# Altium PCB BMS (1).PcbDoc
Units mm, origin at the board's own origin, x right, y up, seen from the top; angles counter-clockwise.
Board outline 223.65 x 130.81 mm, 2 copper layers (Top Layer, Bottom Layer); 85 components, 67 nets, 268 pads, 0 vias.
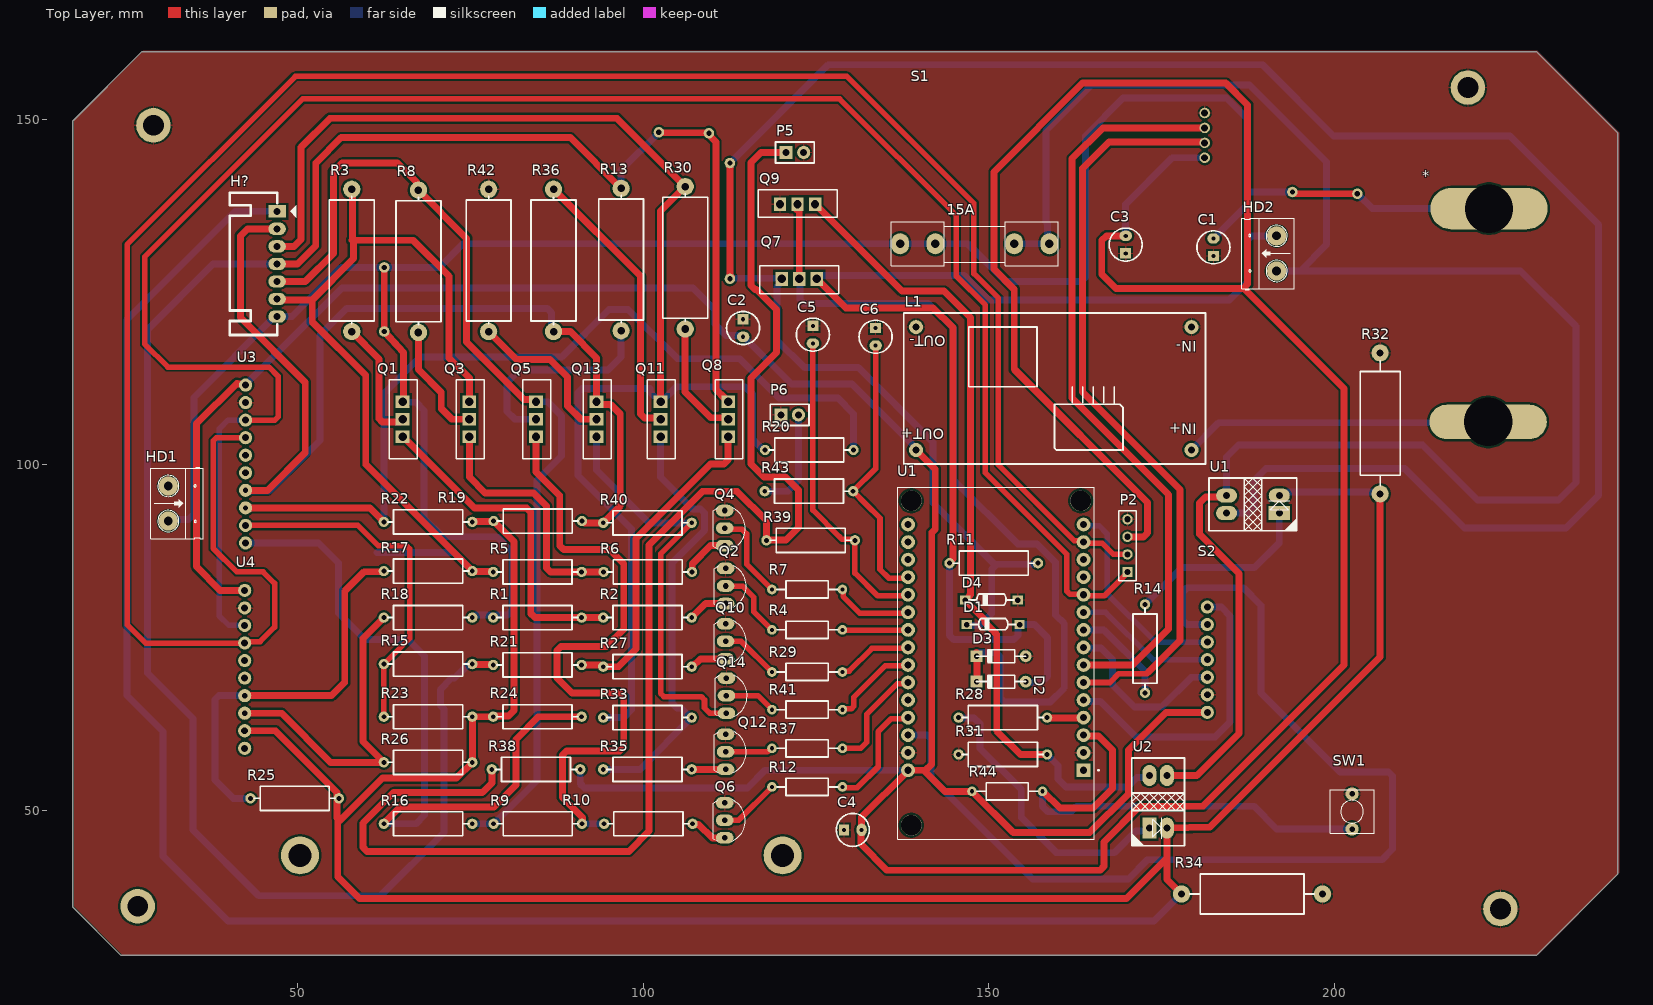
[diagram p0: Top Layer view]
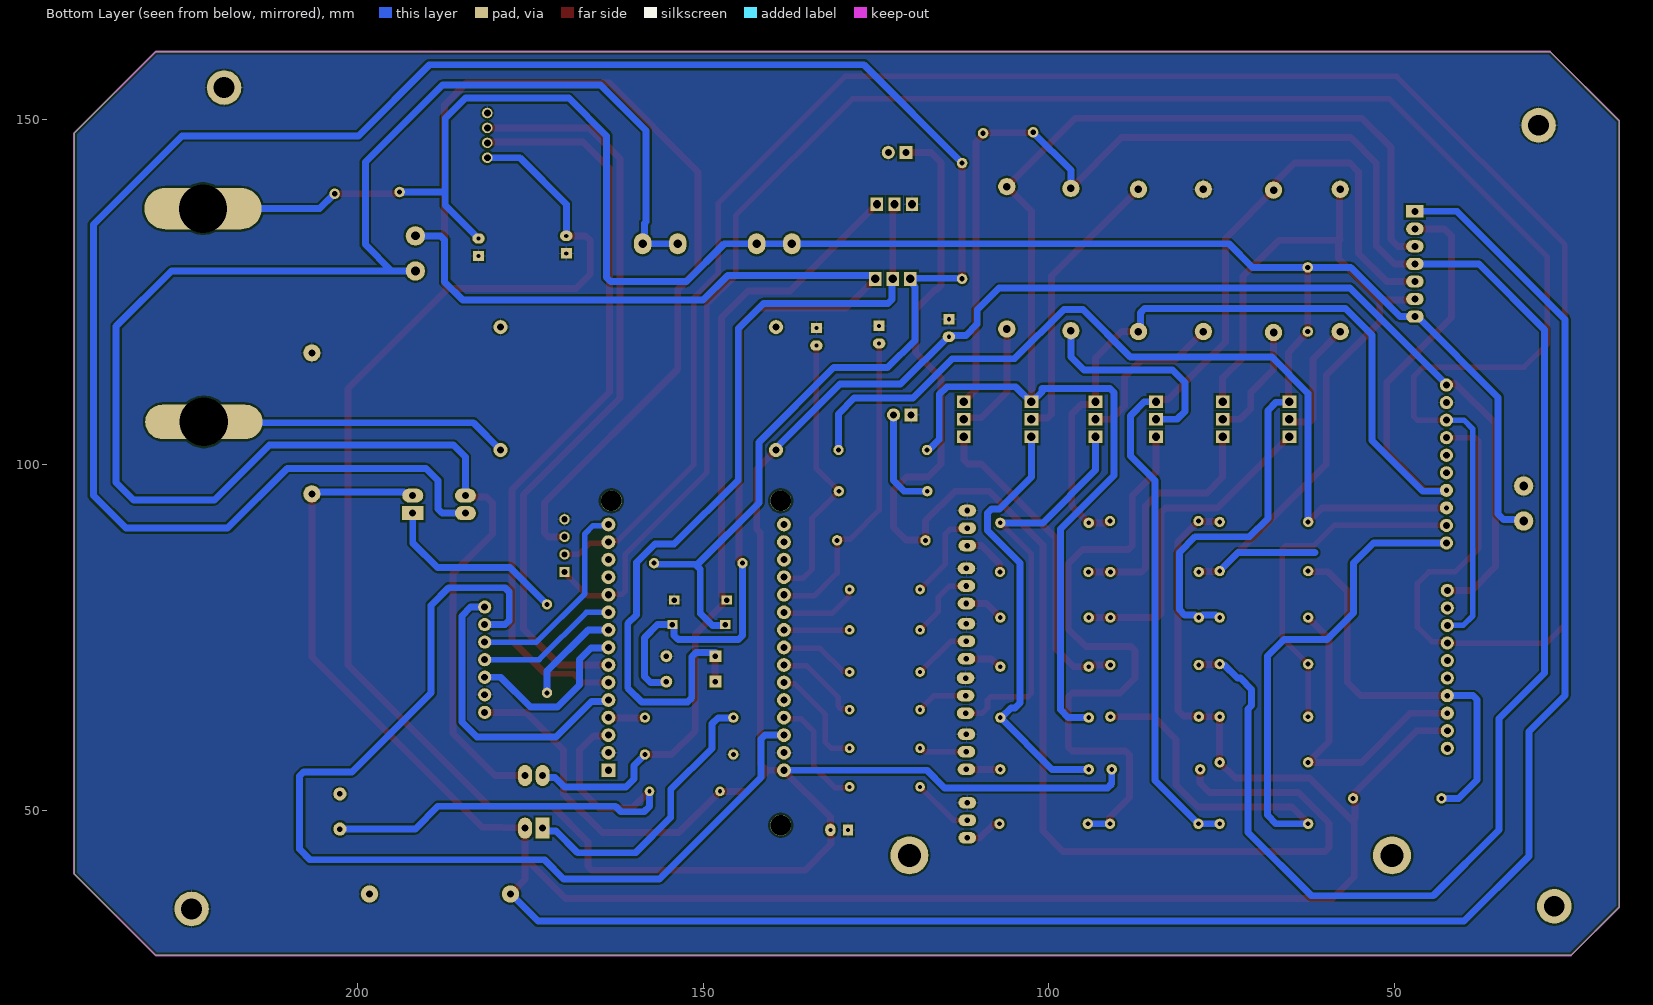
[diagram p1: Bottom Layer view, seen from below]
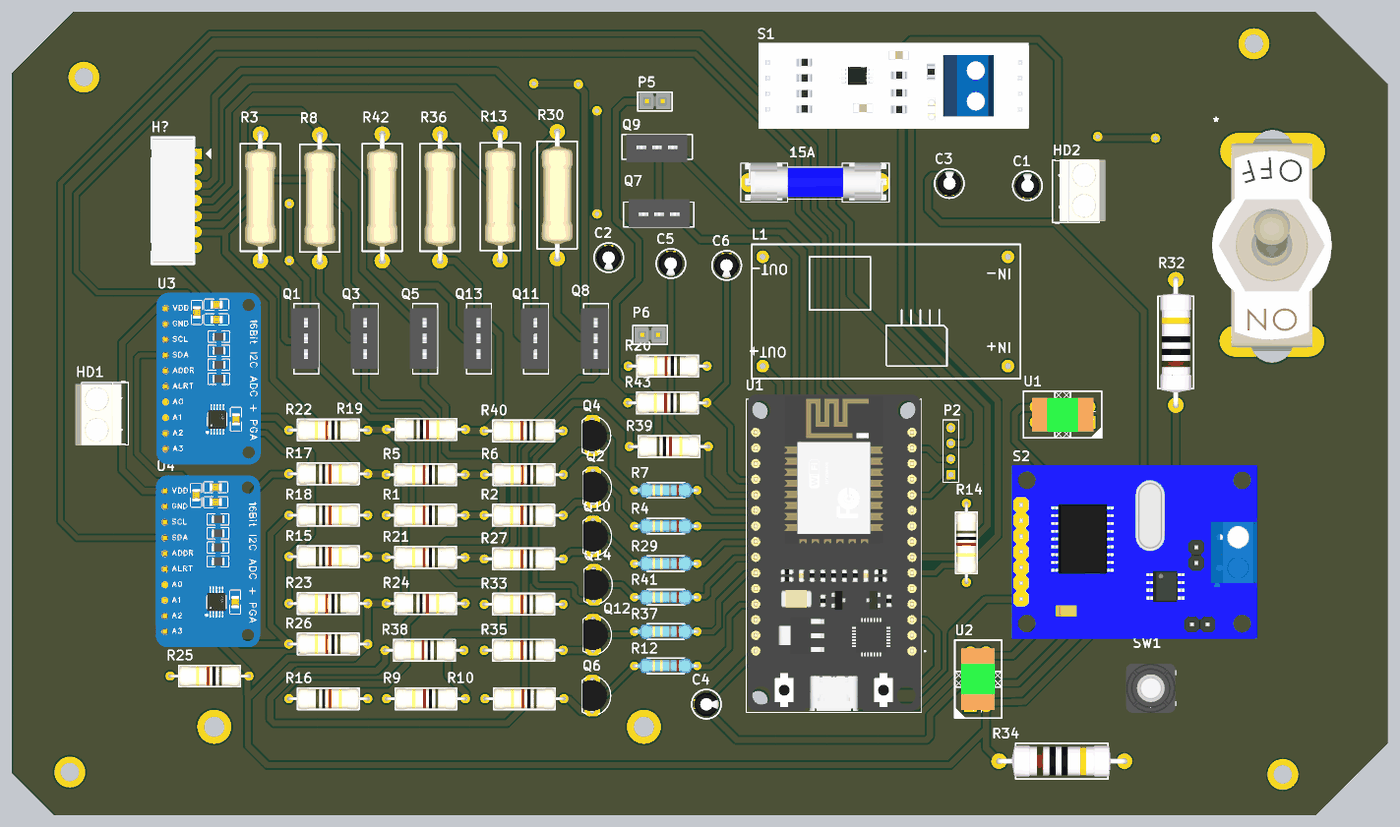
[diagram p2: 3D render of the assembled board from above, using the file's embedded part models]

## Layer stack, top to bottom
Top Solder: solder mask 0.0102, Solder Resist, Dk 3.5
Top Layer: signal copper 0.0356
Dielectric 1: dielectric 0.32, FR-4, Dk 4.8
Bottom Layer: signal copper 0.0356
Bottom Solder: solder mask 0.0102, Solder Resist, Dk 3.5

## Board outline
24.384,28.956 17.399,35.941 17.399,127.889 17.399,149.733 27.432,159.766 229.235,159.766 241.046,147.955 241.046,40.767 229.235,28.956

## Design rules (kind name [scope] priority, off if disabled: settings)
Clearance [All] p1: gap=0.3 ignorepadtopadclearanceinfootprint=FALSE
PolygonConnect [All] p1: connectstyle=Relief reliefconductorwidth=0.254 reliefentries=4 polygonreliefangle="90 Angle" airgapwidth=0.254
RoutingVias [All] p1: holewidth=0.711 width=1.27 viastyle="Through Hole" minholewidth=0.711 minwidth=1.27 maxholewidth=0.711 maxwidth=1.27
SolderMaskExpansion [All] p1: expansion=0 istentingtop=FALSE
Width [All] p1: maxlimit=1.2 minlimit=0.8 preferedwidth=1 minimp=50.000000 maximp=50.000000 favimp=50.000000
30 further rules are at their usual default settings.

## Components (designator, comment, footprint, x,y, rotation, side; value= is the part's Value field where it differs from the comment)
15A "Fuse" Fuse 147.955,131.953 r0 top
* "Component_3" PCBComponent_1#1 222.25,129.159 r270 top
C1 "Cap" C3MM 182.499,131.445 r90 top value=1uf
C2 "Cap" C3MM 114.427,119.761 r270 top value=100uF
C3 "Cap" C3MM 169.799,131.826 r90 top value=1uf
C4 "Cap" C3MM 130.302,47.117 r0 top value=100uF
C5 "0.1uf" C3MM 124.531,118.797 r270 top
C6 "Cap" C3MM 133.604,118.491 r270 top value=0.1UF
D1 "Diode Zener" DIODE/NOM/0.5A 154.432,76.835 r180 top
D2 "Diode Schottky" DO-35 151.765,68.58 r180 top
D3 "Diode Schottky" DO-35 151.765,72.263 r180 top
D4 "Diode Zener" DIODE/NOM/0.5A 154.178,80.391 r180 top
H? "PIN" "Header 7P DC 2.54" 46.99,136.653 r180 top
HD1 "Header 2" HED2 31.242,96.901 r270 top
HD2 "Header 2" HED2 191.643,128.016 r90 top
L1 "" BUCK_LM2596 159.766,110.236 r180 top
P2 "LCD" HDR1X4 170.053,84.455 r90 top value="Header 4P"
P5 "Header 2" "Header 2" 120.65,145.161 r0 top
P6 "Header 2" "Header 2" 119.888,107.188 r0 top
Q1 "IRF9540 DIP" TO220 65.151,104.013 r90 top
Q2 "2N222" TO92-123 111.887,82.423 r270 top value=C1815
Q3 "IRF9540 DIP" TO220 74.803,104.013 r90 top
Q4 "2N222" TO92-123 111.76,90.805 r270 top value=C1815
Q5 "IRF9540 DIP" TO220 84.455,104.013 r90 top
Q6 "2N222" TO92-123 111.76,48.514 r270 top value=C1815
Q7 "IRF3709" TO220 120.015,126.873 r0 top
Q8 "IRF9540 DIP" TO220 112.268,104.013 r90 top
Q9 "IRF3709" TO220 124.841,137.668 r180 top
Q10 "2N222" TO92-123 111.887,74.422 r270 top value=C1815
Q11 "IRF9540 DIP" TO220 102.489,104.013 r90 top
Q12 "2N222" TO92-123 111.887,58.42 r270 top value=C1815
Q13 "IRF9540 DIP" TO220 93.218,104.013 r90 top
Q14 "2N222" TO92-123 112.014,66.548 r270 top value=C1815
R1 "10k" "tro vach 1/2w" 84.659,77.851 r180 top
R2 "56k" "tro vach 1/2w" 100.584,77.851 r180 top
R3 "330R" "tro vach 2w" 57.785,129.54 r270 top
R4 "1k" "tro vach 1/4w" 123.698,76.073 r0 top
R5 "10k" "tro vach 1/2w" 84.659,84.455 r180 top
R6 "47k" "tro vach 1/2w" 100.634,84.455 r180 top
R7 "1k" "tro vach 1/4w" 123.698,81.915 r0 top
R8 "330R" "tro vach 2w" 67.437,129.413 r270 top
R9 "10k" "tro vach 1/2w" 84.709,48.006 r180 top
R10 "30k" "tro vach 1/2w" 100.711,48.006 r180 top
R11 "10k" "tro vach 1/2w" 150.699,85.725 r180 top
R12 "1k" "tro vach 1/4w" 123.698,53.34 r0 top
R13 "330R" "tro vach 2w" 96.774,129.667 r270 top
R14 "1k" "tro vach 1/2w" 172.593,73.356 r270 top
R15 "20K" "tro vach 1/2w" 68.834,71.12 r0 top
R16 "30K" "tro vach 1/2w" 68.834,48.006 r0 top
R17 "40K" "tro vach 1/2w" 68.834,84.582 r0 top
R18 "50K" "tro vach 1/2w" 68.834,77.851 r0 top
R19 "10K" "tro vach 1/2w" 84.709,91.821 r0 top
R20 "10K" "tro vach 1/2w" 124.002,102.108 r180 top
R21 "10k" "tro vach 1/2w" 84.659,70.993 r180 top
R22 "10K" "tro vach 1/2w" 68.834,91.694 r180 top
R23 "10K" "tro vach 1/2w" 68.834,63.5 r180 top
R24 "10K" "tro vach 1/2w" 84.659,63.5 r0 top
R25 "10k" "tro vach 1/2w" 49.53,51.689 r180 top
R26 "10k" "tro vach 1/2w" 68.834,56.896 r180 top
R27 "20k" "tro vach 1/2w" 100.584,70.739 r180 top
R28 "1k" "tro vach 1/2w" 152.019,63.373 r0 top
R29 "1k" "tro vach 1/4w" 123.698,69.977 r0 top
R30 "330R" "tro vach 2w" 106.045,129.921 r270 top
R31 "1k" "tro vach 1/2w" 152.019,58.039 r180 top
R32 "0.02R" "tro vach 3w" 206.629,105.958 r90 top
R33 "10k" "tro vach 1/2w" 100.584,63.373 r180 top
R34 "0.02R" "tro vach 3w" 188.087,37.846 r0 top
R35 "10k" "tro vach 1/2w" 100.584,55.88 r180 top
R36 "330R" "tro vach 2w" 86.995,129.54 r90 top
R37 "1k" "tro vach 1/4w" 123.698,58.928 r0 top
R38 "10k" "tro vach 1/2w" 84.455,55.88 r180 top
R39 "1k" "tro vach 1/2w" 124.206,89.027 r0 top
R40 "10k" "tro vach 1/2w" 100.584,91.567 r180 top
R41 "1k" "tro vach 1/4w" 123.698,64.516 r0 top
R42 "330R" "tro vach 2w" 77.597,129.54 r270 top
R43 "10k" "tro vach 1/2w" 123.952,96.139 r180 top
R44 "1k" "tro vach 1/4w" 152.654,52.705 r0 top
S1 "RS485" PCBComponent_1#2 176.53,162.814 r270 top
S2 "MSP1505" PCBComponent_1#3 186.563,62.103 r90 top
SW1 "SW" SW2 202.565,47.244 r90 top value="SW chip 2 pin"
U1 "ESP32-DEVKIT-V1" MODULE_ESP32_DEVKIT_V1 151.003,71.268 r180 top
U1 "OPTO_U" OPTO_U 192.024,98.044 r270 top value=TLP5211
U2 "OPTO_U" OPTO_U 178.308,47.371 r180 top value=TLP5211
U3 "ADS1115" ADS1115 60.579,110.49 r270 top
U4 "ADS1115" ADS1115 60.452,80.772 r270 top

## Footprints (in the part's own frame and the unit in brackets; to place one, negate y for a bottom-side part, rotate by r counter-clockwise, add the part's x,y. Pads: shape width x height; smd on the part's side, far side on the other; paste and mask are expansions set on the pad)
ADS1115 [mil]
  round 75 hole 39.37: 1(-40,-715) 2(60,-715) 3(160,-715) 4(260,-715) 5(360,-715) 6(460,-715) 9(760,-715) 10(860,-715)
  round 75 hole 30: 7(560,-715) 8(660,-715)
  body extent -141,-775 961,-107, height 118
BUCK_LM2596 [mil]
  round 80 hole 40: 1(-770,320) 2(-770,-380) 3(800,-380) 4(800,320)
  silkscreen extent -850,-460 870,400
C3MM [mm]
  rect 1.5x1.58 hole 0.6: 1(-1.27,0)
  oval 1.5x1.8 hole 0.6: 2(1.27,0)
  silkscreen extent -2.39,-2.39 2.39,2.39, body extent -2,-2.03 1.99,1.97, height 7.01
DIODE/NOM/0.5A [mm]
  rect 1.5x1.3 hole 0.8: 1(0,0) 2(7.62,0)
  silkscreen extent 0.64,-0.89 7.11,0.76
DO-35 [mil] "Diode, Axial; Body 3.8 x 1.9 mm (LxDia. max), Lead Dia. 0.53 mm (max); Solder Pad 35mil"
  round 67 hole 32: 1(-139.76,0)
  rect 67x67 hole 32: 2(139.76,0)
  silkscreen extent -140,-37 140,37, body extent -148,-40 148,39, height 89
Fuse [mil] "De Fuse"
  oval 100x120 hole 50: 1(-425,0) 1(-225,0) 2(225,0) 2(425,0)
  silkscreen extent -475,-125 475,125, body extent -448,-117 459,127, height 378
HDR1X4 [mm] "Connector; Header; 4 Position"
  rect 1.5x1.5 hole 0.9: 1(0,0)
  round 1.5 hole 0.9: 2(2.54,0) 3(5.08,0) 4(7.62,0)
  silkscreen extent -1.27,-1.27 8.89,1.27, body extent -1.27,-1.27 8.89,1.27, height 7
"Header 2" [mil] "Connector; Header; 2 Position; Solder Pad 35mil"
  rect 75x75 hole 40: 1(0,0)
  round 75 hole 40: 2(100,0)
  silkscreen extent -60,-60 160,60, body extent -50,-50 150,50, height 330
"Header 7P DC 2.54" [mil]
  rect 100x70 hole 40: 1(0,0.04)
  oval 100x70 hole 40: 2(0,100.04) 3(0,200.04) 4(0,300.04) 5(0,400.04) 6(0,500.04) 7(0,600.04)
  silkscreen extent -110,-105 270,705, body extent -5,-94 271,694, height 237
HED2 [mil] "Header 2, 2 pin, hight 300mil, Pin to Pin 200, Colour Green"
  round 110 hole 50: 1(0,0) 2(200,0)
  silkscreen extent -106,-100 300,200, body extent -92,-140 302,155, height 394
MODULE_ESP32_DEVKIT_V1 [mm]
  rect 2x2 hole 1.02: 1(-12.7,15.515)
  round 2 hole 1.02: 2(-12.7,12.975) 3(-12.7,10.435) 4(-12.7,7.895) 5(-12.7,5.355) 6(-12.7,2.815) 7(-12.7,0.275) 8(-12.7,-2.265) 9(-12.7,-4.805) 10(-12.7,-7.345) 11(-12.7,-9.885) 12(-12.7,-12.425) 13(-12.7,-14.965) 14(-12.7,-17.505) 15(-12.7,-20.045) 16(12.7,-20.045) 17(12.7,-17.505) 18(12.7,-14.965) 19(12.7,-12.425) 20(12.7,-9.885) 21(12.7,-7.345) 22(12.7,-4.805) 23(12.7,-2.265) 24(12.7,0.275) 25(12.7,2.815) 26(12.7,5.355) 27(12.7,7.895) 28(12.7,10.435) 29(12.7,12.975) 30(12.7,15.515)
  round 3 on Mech1: ""(-12.28,23.475)
  round 3 hole 3 unplated: ""(-12.28,-23.475) ""(12.23,23.475) ""(12.23,-23.475)
  silkscreen extent -14.95,-25.48 14.23,25.48, body extent -14.1,-26.26 14.05,25.24, height 7.01
OPTO_U [mil]
  rect 80x120 hole 40: A(200,0)
  oval 80x120 hole 40: C(100,-300) E(200,-300) K(100,0)
  silkscreen extent 0,-400 300,100, body extent 43,-347 260,47, height 374
PCBComponent_1#1 [mm]
  oval 6x17 hole 7 unplated: 1(-7.874,0.127)
  oval 5x17 hole 7: 2(22.987,0)
  body extent -9.86,-9.75 24.64,9.75, height 43.26
PCBComponent_1#2 [mm]
  round 1.524 hole 1: 1(18.415,4.699) 2(16.256,4.699) 3(14.097,4.699) 4(11.938,4.699)
  body extent 8.13,-38.07 22.13,6.6, height 17.88
PCBComponent_1#3 [mm]
  round 1.905 hole 1: 1(2.032,4.953) 2(4.572,4.953) 3(7.112,4.953) 4(9.652,4.953) 5(12.192,4.953) 6(14.732,4.953) 7(17.272,4.953)
  body extent -4.32,-33.3 23.88,6.6, height 14.2
SW2 [mil] "SW button 2pin, 250x 250 mil"
  round 75 hole 31: 1(0,0) 2(200,0)
  silkscreen extent -25,-125 225,125, body extent -60,-163 255,157, height 257
TO92-123 [mil] "TO-92"
  oval 66x100 hole 32: 1(-100,0) 2(0,0) 3(100,0)
  silkscreen extent -117,-65 120,118, body extent -109,-66 109,95, height 245
TO220 [mm]
  rect 1.8x2 hole 1.2: 1(0,0) 2(2.54,0) 3(5.08,0)
  silkscreen extent -3.17,-2.13 8.25,1.91, body extent -2.36,-2.13 7.54,2.37, height 8.08
"tro vach 1/2w" [mm]
  round 1.5 hole 0.7: 1(-6.4,0) 2(6.4,0)
  silkscreen extent -5.84,-1.75 5.84,1.75, body extent -6.62,-1.75 6.62,1.75, height 3.5
"tro vach 1/4w" [mm]
  round 1.4 hole 0.6: 1(-5.1,0) 2(5.1,0)
  silkscreen extent -4.39,-1.25 4.42,1.25, body extent -5.38,-1.2 5.38,1.2, height 2.41
"tro vach 2w" [mm]
  round 2.5 hole 1.1: 1(-10.3,0) 2(10.3,0)
  silkscreen extent -9.27,-3.25 9.14,3.25, body extent -10.56,-2.5 10.56,2.5, height 5.5
"tro vach 3w" [mm]
  round 2.5 hole 1: 1(-10.2,0) 2(10.2,0)
  silkscreen extent -9.02,-2.9 9.02,2.9, body extent -10.56,-2.5 10.56,2.5, height 7.5

## Part data
C1 C2 C3 C4 C6: "Capacitor", LatestRevisionDate=17-Jul-2002, LatestRevisionNote="Re-released for DXP Platform.", PackageReference=RAD-0.3, Published=8-Jun-2000, Publisher="Altium Limited"
C5: library part Cap, "Capacitor", LatestRevisionDate=17-Jul-2002, LatestRevisionNote="Re-released for DXP Platform.", PackageReference=RAD-0.3, Published=8-Jun-2000, Publisher="Altium Limited"
D1 D4: library part "Diode Zener_1", "Zener Diode", LatestRevisionDate=17-Jul-2002, LatestRevisionNote="Re-released for DXP Platform.", PackageReference=DIODE-0.7, Published=8-Jun-2000, Publisher="Altium Limited"
D2 D3: "Schottky Rectifier", PackageDocument=Feb-1998, ComponentLink1Description="Manufacturer Link", ComponentLink1URL=http://www.irf.com/, ComponentLink2Description=Datasheet, ComponentLink2URL=http://www.irf.com/product-info/datasheets/data/10tq.pdf, DatasheetDocument=PD-2.057B, LatestRevisionDate=17-Jul-2002, LatestRevisionNote="Re-released for DXP Platform.", Note="Terminal 2 is the TAB and is electrically connected to the cathode", PackageReference=TO-220AC, Published=8-Jun-2000, Publisher="Altium Limited"
H?: library part "Header 7P 2.54 Duc Cong", "Cắm", Chung_Loai=Cắm, Don_Vi=Con, Ma_Hang=MH004118, Ten_Linh_Kien="Header 7P XH2.54-7P Đực Cong"
HD1 HD2: library part Hed2, "Header 2 (Green)"
L1: library part BUCK_LM2596
P2: library part "Header 4x1", "Header, 4 Pin Pitch 2.54mm", MPN=S1012EC-40-ND, CompanyID=VT-00125, Solder=WAVE
P5 P6: "Header, 2-Pin", LatestRevisionDate=17-Jul-2002, LatestRevisionNote="Re-released for DXP Platform.", Publisher="Altium Limited"
Q1 Q3 Q5 Q8 Q11 Q13: library part "FET IRF9540 DIP", "TO-200", ComponentLink1Description="Manufacturer Link", ComponentLink1URL=http://www.irf.com/, ComponentLink2Description=Datasheet, ComponentLink2URL=http://www.irf.com/product-info/datasheets/data/irf9540.pdf, DatasheetVersion=PD-9.421C, LatestRevisionDate=17-Jul-2002, LatestRevisionNote="Re-released for DXP Platform.", Note="Pin 2 is electrically connected to pin 4.", PackageDescription="TO, Thru-Hole, Vertical, Heatsink Mounted; 3 In-Line Leads; Pitch 2.54 mm", PackageReference=TO-220AB, PackageVersion=Feb-1997, Published=8-Jun-2000, Publisher="Altium Limited"
Q2 Q4 Q6 Q10 Q12 Q14: "NPN 600mW, ECB"
Q7 Q9: library part "FET IRF3709 DIP", "TO-200"
R1 R2 R5 R6 R9 R10 R11 R14 R15 R16 R17 R18 R19 R20 R21 R22 R23 R24 R25 R26 R27 R28 R31 R33 R35 R38 R39 R40 R43: library part "Tro Vach 1/2W 5% 1k", "Cắm", Chung_Loai=Cắm, Don_Vi=Con, Ma_Hang=MH007240, So_Chan=2, Ten_Linh_Kien="Trở 5% 1/2w 1K"
R3 R8 R13 R30 R36 R42: library part "Tro Vach 2W 5% 330R", "Cắm", Chung_Loai=Cắm, Don_Vi=Con, Ma_Hang=MH006373, So_Chan=2, Ten_Linh_Kien="Trở 5% 2w 330R"
R4 R7 R12 R29 R37 R41 R44: library part "Tro Vach 1/4W 5% 1R", "Cắm", Chung_Loai=Cắm, Don_Vi=Con, Ma_Hang=MH007394, So_Chan=2, Ten_Linh_Kien="Trở Vạch 1/4w 5% 1R"
R32 R34: library part "Tro Vach 3W 5% 0.02R", "Cắm", Chung_Loai=Cắm, Don_Vi=Con, Ma_Hang=MH007953, So_Chan=2, Ten_Linh_Kien="Trở 5% 3w 0.02R"
S1: library part Component_3
S2: library part Component_5
SW1: library part SW2, "Switch button 2 pin"
U1: "Dual core, Wi-Fi: 2.4 GHz up to 150 Mbits/s,BLE (Bluetooth Low Energy) and legacy Bluetooth, 32 bits, Up to 240 MHz", Package=None, Availability=Unavailable, MP=ESP32-DEVKIT-V1, Price=None
U1 U2: "Single Opto"
U3 U4: library part Component_2
15A: LatestRevisionDate=17-Jul-2002, LatestRevisionNote="Re-released for DXP Platform.", PackageReference=PIN-W2/E2.8, Published=8-Jun-2000, Publisher="Altium Limited"

## Free pads (board coordinates)
  round 1.524 hole 0.762: 2(112.522,126.873) 3(112.522,143.637) 10(62.484,128.524) 11(102.235,148.082) 12(109.474,147.955) 13(62.484,119.253) 30(193.929,139.446) 31(203.327,139.192)
  round 5 hole 3: 14(29.083,149.098) 16(26.797,36.068) 16(224.028,35.687) 17(219.329,154.559)
  round 5.5 hole 3.3: 28(50.292,43.434) 29(120.142,43.434)

## Nets (pads, with @x,y where several pads share a name; then routed paths per layer and width w, separated by ;. In a path a pad name is that pad's centre, name@x,y a point inside that pad or via, vN(x,y) a via of type N, cw(c..) or ccw(c..) an arc to the next point about the centre after c; other vN are vias at no path point)
+5: C2.2 C3.2 C4.2 L1.4 P2.3 R38.1 R44.1 S1.1 S2.1 U1.30 U3.1 U4.1 | length 652.9
  Top Layer w1: U4.1 38.735,81.788 35.306,85.217 35.306,105.918 41.148,111.76 41.229,111.679 42.245,111.679 U3.1 ; U1.30@138.303,55.605 138.216,55.605 131.572,48.961 C4.2 131.476,47.021 131.476,45.076 135.277,41.275 166.07,41.275 166.655,41.861 166.655,45.37 171.831,50.546 180.975,50.546 201.422,70.993 201.422,110.998 186.944,125.476 186.817,125.476 ; U1.30 140.843,55.753 141.732,56.642 141.732,90.17 142.24,90.678 142.24,99.314 L1.4 ; 140.78,55.562 143.637,52.705 R44.1 153.523,46.736 164.592,46.736 170.18,52.324 170.18,58.674 175.641,64.135 S2.1 ; C3.2 167.005,133.096 166.328,132.419 166.328,127.55 168.402,125.476 186.817,125.476 ; P2.3 172.388,89.535 172.974,90.121 172.974,94.488 153.67,113.792 153.67,125.349 150.749,128.27 150.749,142.367 163.576,155.194 184.277,155.194 187.452,152.019 187.452,126.111 186.817,125.476
  Bottom Layer w1: U3.1 42.418,111.589 49.199,118.37 56.351,125.522 107.151,125.522 110.326,122.347 110.326,120.315 111.977,118.664 113.969,118.664 114.142,118.491 C2.2 114.564,118.491 121.422,111.633 130.185,111.633 139.446,102.372 L1.4 ; R38.1 90.855,53.799 91.441,53.213 115.062,53.213 117.602,55.753 U1.30 ; C3.2 169.799,137.668 176.53,144.399 S1.1
A0: H?.2 Q13.3 R19.2 R36.1 R40.2 U3.7 | length 157.5
  Top Layer w1: U3.7 45.593,96.266 51.054,101.727 51.054,111.887 41.656,121.285 41.656,133.096 42.672,134.112 H?.2 ; R36.1 89.421,119.24 93.218,115.443 Q13.3 93.618,108.693 95.269,108.693 96.647,107.315 96.647,94.03 R40.2 91.498,91.567 91.244,91.821 R19.2
  Bottom Layer w1: U3.7 42.545,96.139 45.847,96.139 53.213,103.505 53.213,118.741 57.027,122.555 86.122,122.555 86.708,121.969 86.708,119.527 R36.1
A1: R20.1 R22.2 U3.8 | length 123.9
  Top Layer w1: U3.8 60.402,93.726 R22.2
  Bottom Layer w1: R22.2 62.434,110.313 67.691,115.57 88.177,115.57 95.035,122.428 97.79,122.428 104.902,115.316 113.919,115.316 119.634,109.601 128.143,109.601 130.402,107.342 R20.1
A2: R15.1 R23.2 U3.9 | length 51
  Top Layer w0.8: U3.9 58.674,91.186 61.595,88.265 65.698,88.265 66.167,87.796 66.167,74.853 R15.1 R23.2
A3: R16.1 R24.2 U3.10 | length 105.3
  Top Layer w1: R16.1@62.396,48.045 64.77,50.419 78.359,50.419 81.534,53.594 81.534,60.198 84.836,63.5 R24.2
  Bottom Layer w1: U3.10 52.965,88.646 55.88,85.731 55.88,78.486 59.69,74.676 65.913,74.676 68.326,72.263 68.326,49.276 67.056,48.006 R16.1
A4: R17.1 R25.2 U4.7 | length 57.8
  Top Layer w1: U4.7 54.864,66.548 56.769,68.453 56.769,81.661 59.594,84.486 62.338,84.486 R17.1
  Bottom Layer w1: U4.7 38.559,66.548 37.973,65.962 37.973,54.356 40.64,51.689 R25.2
A5: R18.1 R26.2 U4.8 | length 46.5
  Top Layer w1: U4.8 47.625,64.008 54.737,56.896 R26.2 59.436,59.894 59.436,74.853 R18.1
A6: H?.1 R19.1 R22.1 R23.1 R24.1 R25.1 R26.1 R32.1 R34.1 U1.K U2.K U4.9 | length 572.1
  Top Layer w1: U4.9 46.736,61.468 55.676,52.528 R25.1@55.676,51.689 ; R25.1@55.699,51.689 55.834,51.554 55.834,51.458 55.676,51.3 55.676,48.864 55.753,48.787 55.753,40.386 58.928,37.211 169.926,37.211 175.768,43.053 ; 56.089,48.469 62.23,54.61 72.948,54.61 R26.1 R23.1 R24.1 78.355,63.596 80.487,63.596 81.28,64.389 81.28,88.85 R19.1 78.246,91.757 75.297,91.757 R22.1 ; R34.1 175.768,39.965 175.768,43.053 ; R32.1@206.629,96.214 206.629,72.136 182.015,47.522 U2.K 175.768,43.053
  Bottom Layer w1: H?.1 40.894,136.652 25.243,121.001 25.243,66.578 30.48,61.341 30.48,43.307 39.878,33.909 173.884,33.909 177.821,37.846 R34.1 ; U1.K 192.811,95.504 193.319,96.012 R32.1@206.775,96.012
B1: H?.3 Q11.3 R20.2 R30.1 R33.2 | length 201.7
  Top Layer w1: H?.3 49.403,131.572 50.417,132.586 50.417,145.921 54.61,150.114 96.152,150.114 R30.1 102.489,136.665 Q11.3
  Bottom Layer w1: R33.2 97.155,63.373 98.298,64.516 98.298,90.678 93.599,95.377 90.551,98.425 90.551,110.412 91.137,110.998 100.965,110.998 100.965,110.517 102.389,109.093 102.589,109.093 104.748,111.252 114.681,111.252 115.824,110.109 115.824,103.632 117.098,102.358 117.217,102.358 R20.2@117.475,102.1
B2: H?.4 pad.11 pad.12 Q8.3 R13.1 R15.2 R21.2 | length 297
  Top Layer w1: H?.4 49.911,129.032 52.578,131.699 52.578,143.637 56.261,147.32 89.421,147.32 R13.1 ; R15.2 75.297,71.056 78.196,71.056 R21.2 ; pad.11 102.298,148.018 109.41,148.018 pad.12 ; pad.12@109.474,147.701 110.49,146.685 110.49,110.871 111.768,109.593 111.768,109.493 112.168,109.093 Q8.3
  Bottom Layer w1: H?.4 37.719,129.032 28.194,119.507 28.194,69.85 34.798,63.246 34.798,47.117 44.323,37.592 61.976,37.592 71.12,46.736 71.12,64.62 70.606,65.134 70.606,67.454 72.246,69.094 72.65,69.094 74.58,71.024 75.138,71.024 R15.2 ; R13.1 96.774,142.621 pad.11
B3: H?.5 Q5.3 R8.1 R9.2 R16.2 | length 145.8
  Top Layer w1: H?.5 51.054,126.492 55.118,130.556 55.118,142.367 56.388,143.637 64.389,143.637 67.15,140.876 67.15,140 74.422,132.728 74.422,117.729 82.746,109.405 84.143,109.405 Q5.3
  Bottom Layer w1: R16.2 R9.2 84.582,54.279 84.582,97.663 88.138,101.219 88.138,107.061 86.106,109.093 Q5.3
B4: H?.6 Q3.3 R3.1 R5.2 R17.2 | length 126.1
  Top Layer w1: H?.6 47.117,123.825 52.07,123.825 ; 57.785,132.461 66.675,132.461 71.882,127.254 71.882,115.443 74.803,112.522 Q3.3 ; R3.1 57.912,139.713 57.912,132.461 ; 58.039,132.461 58.039,129.794 52.07,123.825 ; R5.2 78.196,84.519 75.297,84.519 R17.2 59.817,99.999 59.817,112.903 52.07,120.65 52.07,123.825
  Bottom Layer w1: 61.468,87.249 72.567,87.249 R17.2
B5: 15A.1 *.1 C1.2 H?.7 HD1.2 pad.10 pad.13 pad.30 pad.31 Q1.3 R1.2 R18.2 | length 334.1
  Top Layer w1: pad.10 pad.13 65.278,116.205 65.278,109.22 Q1.3 ; pad.30 194.071,139.446 194.325,139.192 pad.31
  Bottom Layer w1: HD1.2 31.472,92.051 34.139,92.051 34.925,92.837 34.925,109.728 46.609,121.412 H?.7 49.149,121.412 56.261,128.524 pad.10 62.502,128.506 70.467,128.506 73.914,131.953 137.16,131.953 142.24,131.953 146.939,131.953 152.4,126.492 163.371,126.492 163.957,127.078 163.957,147.574 169.418,153.035 184.404,153.035 187.325,150.114 187.325,139.446 ; Q1.3 65.231,109.013 67.065,109.013 68.236,107.842 68.236,92.221 70.903,89.554 78.777,89.554 81.063,87.268 81.063,79.013 80.301,78.251 78.794,78.251 78.394,77.851 R1.2 78.124,77.851 77.724,78.251 75.769,78.251 75.369,77.851 R18.2 ; C1.2 182.514,132.715 182.745,132.946 182.745,132.961 187.325,137.541 187.325,139.446 ; pad.30 187.325,139.446 ; pad.31 205.486,137.033 *.1
CS: S2.3 U1.8 | length 25.7
  Bottom Layer w1: U1.8 163.79,73.446 166.203,73.446 167.894,71.755 167.894,68.072 171.069,64.897 175.006,64.897 179.324,69.215 S2.3@181.864,69.215
GND: C1.1 C2.1 C3.1 C4.1 C5.1 C6.1 D3.1 D4.1 HD1.1 L1.2 L1.3 P2.4 P5.2 P6.1 pad.14 pad.16@224.028,35.687 pad.17 Q2.1 Q4.1 Q6.1 Q9.3 Q10.1 Q12.1 Q14.1 R31.2 R32.2 R34.2 R42.1 S1.4 S2.2 SW1.2 U1.2 U1.29 U3.2 U4.2
INT: S2.7 U1.5 | length 43.3
  Bottom Layer w1: U1.5 163.894,65.722 166.18,65.722 171.323,60.579 182.753,60.579 184.912,62.738 184.912,78.105 183.642,79.375 S2.7@181.864,79.375
Net15A_2: 15A.2 HD2.1 U1.C U2.C | length 270.4
  Top Layer w1: U2.C 180.086,54.991 186.182,61.087 186.182,84.201 180.467,89.916 180.467,94.41 181.38,95.323 184.223,95.323 U1.C
  Bottom Layer w1: 15A.2@153.67,131.953 158.75,131.953 158.455,132.248 158.455,134.918 158.242,135.132 158.242,148.336 164.846,154.94 187.706,154.94 198.882,143.764 198.882,131.826 195.072,128.016 ; U1.C 184.404,101.092 186.118,102.806 212.788,102.806 220.726,94.869 232.41,94.869 234.95,97.409 234.95,120.015 226.949,128.016 195.072,128.016 ; HD2.1 195.072,128.016
Net*_2: *.2 L1.1 | length 47.1
  Bottom Layer w1: L1.1 183.261,106.045 *.2@224.79,106.045
NetC6_2: C6.2 R43.1 U1.19 | length 39.9
  Top Layer w0.8: C6.2 133.604,99.391 R43.1 132.177,94.314 134.239,92.252 134.239,84.836 135.53,83.545 U1.19@138.303,83.545
NetD1_2: D1.2 pad.2 pad.3 Q7.1 R11.1 U1.E | length 346.8
  Top Layer w1: pad.2 112.776,127.142 112.522,127.396 pad.3
  Bottom Layer w1: pad.2 112.613,126.964 119.615,126.964 119.924,126.964 Q7.1 119.615,126.473 119.615,126.054 119.349,125.787 119.349,117.966 123.286,114.029 131.097,114.029 141.901,103.225 141.901,94.446 150.775,85.572 151.172,85.572 ; pad.3 126.746,157.861 189.611,157.861 199.898,147.574 225.425,147.574 238.252,134.747 238.252,95.504 233.553,90.805 218.821,90.805 210.185,99.441 190.119,99.441 188.341,97.663 188.341,93.55 187.755,92.964 U1.E ; D1.2 146.962,76.685 147.644,76.685 147.648,76.682 148.632,76.682 150.408,78.458 150.408,84.808 151.172,85.572 ; R11.1 157.003,85.629 156.65,85.629 156.592,85.572 151.172,85.572
NetD2_2: D2.2 D3.2 Q7.2 Q9.2 | length 121.8
  Top Layer w1: Q9.2@122.047,137.033 122.555,136.525 Q7.2 ; D2.2 148.275,68.641 148.275,72.202 D3.2 D3.2@148.215,72.771
  Bottom Layer w1: Q7.2 122.677,126.751 122.677,123.903 123.262,123.317 141.273,123.317 144.907,119.683 144.907,97.79 154.178,88.519 156.972,88.519 159.639,85.852 159.639,78.232 160.909,76.962 160.909,67.691 158.877,65.659 152.224,65.659 151.638,66.245 151.638,72.185 151.052,72.771 D3.2@148.215,72.771
NetD4_2: D4.2 Q9.1 R31.1 U2.E | length 118.9
  Top Layer w1: Q9.1 124.841,137.568 125.241,137.168 125.341,137.168 137.414,125.095 143.51,125.095 147.32,121.285 147.32,81.153 146.808,80.641 146.808,80.541 D4.2@146.658,80.391 ; D4.2 D4.2@146.658,80.391 ; R31.1 154.559,58.039 151.13,61.468 151.13,75.438 149.459,77.109 149.459,77.475 146.808,80.126 146.808,80.241 D4.2@146.658,80.391
  Bottom Layer w1: R31.1 160.02,56.438 160.02,54.483 161.163,53.34 170.053,53.34 171.433,54.72 172.751,54.72 173.101,55.07 U2.E@173.101,55.397
NetP5_1: P5.1 R38.2 R39.1 | length 207.3
  Top Layer w1: R38.2 78.055,53.909 76.677,52.53 63.85,52.53 59.405,48.085 59.405,44.607 59.99,44.021 97.886,44.021 100.807,46.942 100.807,88.361 108.573,96.127 113.55,96.127 117.806,91.871 R39.1 117.885,89.106 120.619,89.106 122.428,90.916 122.428,96.314 120.571,98.171 117.475,98.171 115.57,100.076 115.57,112.522 119.253,116.205 119.253,122.428 116.332,125.349 116.156,125.349 115.57,125.935 115.57,143.686 117.045,145.161 P5.1
NetP6_2: P6.2 R43.2 | length 15
  Bottom Layer w1: R43.2 120.898,96.139 122.428,97.669 P6.2
NetQ1_1: Q1.1 R1.1 R2.2 | length 48.5
  Top Layer w1: Q1.1 65.251,104.013 75.538,93.726 83.107,93.726 83.693,93.14 83.693,78.437 84.279,77.851 R1.1 R2.2
NetQ1_2: Q1.2 R3.2 | length 18
  Top Layer w1: R3.2 61.722,115.303 61.722,106.631 62.2,106.153 64.751,106.153 Q1.2
NetQ2_2: Q2.2 R4.1 | length 10.6
  Top Layer w0.8: Q2.2 111.905,82.405 114.357,82.405 115.951,80.811 115.951,78.72 R4.1
NetQ2_3: Q2.3 R2.1 | length 5.7
  Top Layer w1: R2.1 109.016,79.883 Q2.3
NetQ3_1: Q3.1 R5.1 R6.2 | length 36.2
  Top Layer w1: Q3.1 74.803,98.171 77.089,95.885 84.074,95.885 85.979,93.98 85.979,85.041 86.565,84.455 R5.1 R6.2
NetQ3_2: Q3.2 R8.2 | length 17.1
  Top Layer w1: R8.2 67.437,113.744 70.739,110.442 70.739,108.077 72.263,106.553 Q3.2
NetQ4_2: Q4.2 R7.1 | length 13.1
  Top Layer w0.8: Q4.2 111.905,90.66 114.23,90.66 114.935,89.955 114.935,85.578 R7.1
NetQ4_3: Q4.3 R6.1 | length 7
  Top Layer w1: R6.1 107.067,84.488 107.067,85.604 109.728,88.265 Q4.3
NetQ5_1: Q5.1 R9.1 R10.2 | length 93.6
  Top Layer w1: Q5.1 84.455,98.933 87.884,95.504 87.884,88.273 88.47,87.687 95.082,87.687 97.155,85.614 97.155,76.2 94.615,73.66 88.089,73.66 87.503,73.074 87.503,69.088 89.662,66.929 96.569,66.929 97.155,66.343 97.155,59.133 96.569,58.547 88.851,58.547 88.265,57.961 88.265,51.816 91.178,48.903 91.178,48.075 R9.1 ; R10.2@94.248,48.069 R10.2
  Bottom Layer w1: R9.1 R10.2@94.217,48.006
NetQ5_2: Q5.2 R13.2 | length 30.7
  Bottom Layer w1: Q5.2 81.407,106.553 80.264,107.696 80.264,111.887 82.042,113.665 94.869,113.665 96.774,115.57 R13.2
NetQ6_2: Q6.2 R12.1 | length 8.8
  Top Layer w0.8: Q6.2 113.772,48.514 R12.1
NetQ6_3: Q6.3 R10.1 | length 6
  Top Layer w1: R10.1@106.88,47.91 107.977,47.91 109.967,45.92 Q6.3@112.088,45.92
NetQ8_1: Q8.1 R21.1 R27.2 | length 46.4
  Top Layer w1: R21.1 93.795,70.993 94.049,70.739 96.393,70.739 98.933,73.279 98.933,89.281 109.728,100.076 111.682,100.076 112.268,100.662 Q8.1
NetQ8_2: Q8.2 R30.2 | length 17
  Top Layer w1: R30.2 106.045,110.49 109.768,106.767 112.054,106.767 Q8.2
NetQ10_2: Q10.2 R29.1 | length 8.6
  Top Layer w0.8: Q10.2 114.153,74.422 R29.1
NetQ10_3: Q10.3 R27.1 | length 5.4
  Top Layer w1: R27.1 107.119,70.739 108.262,71.882 Q10.3
NetQ11_1: Q11.1 R33.1 R35.2 | length 63.4
  Bottom Layer w1: R35.2 99.491,55.88 R33.1 106.849,63.373 105.446,64.776 104.847,64.776 104.14,65.483 104.14,85.725 108.839,90.424 108.839,92.964 108.253,93.549 107.111,93.549 102.489,98.171 Q11.1
NetQ11_2: Q11.2 R36.2 | length 41
  Top Layer w1: R36.2 99.568,127.267 99.568,107.333 100.154,106.747 102.295,106.747 Q11.2
NetQ12_2: Q12.2 R37.1 | length 6.9
  Top Layer w0.8: Q12.2 117.928,58.42 118.436,58.928 R37.1
NetQ12_3: Q12.3 R35.1 | length 4.9
  Top Layer w1: R35.1 Q12.3
NetQ13_1: Q13.1 Q14.3 R40.1 | length 59.7
  Top Layer w0.8: R40.1 102.489,87.072 102.489,66.89 102.958,66.421 108.37,66.421 108.839,65.952 108.839,64.77 109.22,64.389 109.601,64.008 Q14.3
  Bottom Layer w1: Q13.1 93.218,99.187 100.838,91.567 R40.1
NetQ13_2: Q13.2 R42.2 | length 23.3
  Top Layer w1: R42.2 81.648,115.189 86.487,115.189 89.027,112.649 89.027,108.458 90.932,106.553 Q13.2
NetQ14_2: Q14.2 R41.1 | length 7.4
  Top Layer w0.8: Q14.2 116.566,66.548 R41.1
NetR14_1: R14.1 U1.A | length 27.4
  Bottom Layer w1: R14.1 177.927,85.09 188.468,85.09 192.024,88.646 U1.A
NetR28_1: R28.1 U2.A | length 42.2
  Bottom Layer w1: R28.1 145.66,63.332 147.869,63.332 148.717,62.484 148.717,58.928 154.686,52.959 154.686,48.895 159.766,43.815 168.148,43.815 171.298,46.965 172.712,46.965 172.712,47.617 U2.A@173.101,48.006
NTC: C5.2 R39.2 U1.20 | length 45.8
  Top Layer w0.8: C5.2 124.531,93.401 128.397,89.535 128.771,89.161 130.472,89.161 R39.2 130.606,84.278 133.879,81.005 U1.20@138.303,81.005
PATH-: D1.1 D2.1 HD2.2 Q7.3 R11.2 | length 169.1
  Top Layer w1: Q7.3 125.095,126.773 125.495,126.373 125.595,126.373 129.286,122.682 141.908,122.682 144.78,119.81 144.78,86.341 144.299,85.86 R11.2
  Bottom Layer w1: Q7.3 125.095,126.973 125.495,127.373 125.595,127.373 125.603,127.381 146.431,127.381 149.987,123.825 184.785,123.825 187.41,126.45 187.41,132.51 187.996,133.096 HD2.2 ; R11.2@144.272,85.604 144.272,75.262 144.858,74.676 153.596,74.676 154.182,75.262 154.182,76.685 154.332,76.835 D1.1 156.591,76.835 158.496,74.93 158.496,69.342 157.607,68.453 155.442,68.453 D2.1
Q1: R41.2 U1.24 | length 12.9
  Top Layer w0.8: R41.2 128.913,64.631 130.075,64.631 130.429,64.985 130.429,66.294 134.98,70.845 U1.24@138.303,70.845
Q2: R37.2 U1.25 | length 15.8
  Top Layer w0.8: R37.2 131.445,58.928 132.334,59.817 132.334,63.881 136.758,68.305 U1.25@138.303,68.305
Q3: R29.2 U1.23 | length 10.9
  Top Layer w0.8: R29.2 128.913,70.092 129.782,70.092 133.075,73.385 U1.23@138.303,73.385
Q4: R12.2 U1.27 | length 16.7
  Top Layer w0.8: R12.2 128.913,53.225 129.337,53.225 130.949,53.225 133.985,56.261 133.985,61.341 135.869,63.225 U1.27@138.303,63.225
Q5: R7.2 U1.21 | length 11.5
  Top Layer w0.8: R7.2 128.905,81.808 128.905,80.899 131.339,78.465 U1.21@138.303,78.465
Q6: R4.2 U1.22 | length 9.6
  Top Layer w0.8: R4.2 128.872,75.999 138.229,75.999 U1.22@138.303,75.925
"Q sac": R14.2 U1.9 | length 14.6
  Bottom Layer w1: U1.9 166.624,76.073 172.593,70.104 R14.2@172.593,66.883
"Q xa": R28.2 U1.4 | length 5.3
  Top Layer w1: R28.2 158.493,63.299 163.629,63.299 U1.4@163.703,63.225
RX: S1.3 U1.7 | length 109.4
  Top Layer w1: U1.7 170.815,70.993 176.022,76.2 176.022,95.631 162.052,109.601 162.052,144.272 166.497,148.717 S1.3
SCK: S2.6 U1.28 | length 151.9
  Bottom Layer w1: U1.28 141.019,60.833 141.605,60.247 141.605,54.737 156.337,40.005 170.18,40.005 172.974,42.799 206.883,42.799 208.407,44.323 208.407,54.913 207.821,55.499 200.787,55.499 189.357,66.929 189.357,79.629 186.817,82.169 178.64,82.169 178.054,81.583 178.054,77.421 178.64,76.835 S2.6@181.864,76.835
SCL: P2.1 U1.11 U3.3 U4.3 | length 285.7
  Top Layer w0.8: U3.3 46.648,106.426 47.117,106.895 47.117,112.776 45.783,114.109 31.178,114.109 27.813,117.475 27.813,130.048 50.673,152.908 128.397,152.908 145.289,136.016 145.289,127.253 149.479,123.063 149.479,98.806 161.29,86.995 161.29,81.663 161.759,81.194 163.514,81.194 163.703,81.005 166.73,81.005 169.703,83.978 169.703,84.105 P2.1
  Bottom Layer w0.8: U4.3 40.005,76.708 38.608,78.105 38.608,105.156 39.878,106.426 U3.3
SDA: P2.2 U1.14 U3.4 U4.4 | length 319.5
  Top Layer w0.8: U3.4 38.188,103.886 37.719,103.417 37.719,87.884 41.148,84.455 44.958,84.455 46.609,82.804 46.609,76.454 44.534,74.379 42.502,74.379 U4.4 27.94,74.168 25.273,76.835 25.273,131.826 49.626,156.179 129.444,156.179 147.828,137.795 147.828,127.635 151.384,124.079 151.384,99.949 162.376,88.957 163.696,88.957 U1.14@163.897,88.756 ; U1.14@163.703,88.625 166.391,88.625 168.021,86.995 P2.2@169.672,86.995
SI: S2.5 U1.15 | length 30.3
  Bottom Layer w0.8: U1.15 163.871,91.145 165.903,91.145 167.132,89.916 167.132,81.28 174.117,74.295 S2.5@181.864,74.295
SO: S2.4 U1.10 | length 21
  Bottom Layer w0.8: U1.10 166.878,78.613 173.736,71.755 S2.4@181.864,71.755
sw: R44.2 SW1.1 U1.3 | length 71.9
  Top Layer w1: R44.2 157.862,52.705 160.275,50.292 165.1,50.292 167.894,53.086 167.894,58.674 165.883,60.685 U1.3@163.703,60.685
  Bottom Layer w1: R44.2 157.754,50.526 158.535,49.745 161.912,49.745 162.713,50.546 188.341,50.546 191.643,47.244 SW1.1
TX: S1.2 U1.6 | length 109.9
  Top Layer w0.8: U1.6 167.513,68.453 168.783,69.723 172.847,69.723 173.082,69.958
  Top Layer w1: 173.082,69.958 177.673,74.549 177.673,96.393 163.576,110.49 163.576,142.875 167.386,146.685 180.731,146.685 180.758,146.658 181.129,146.658 S1.2
pads on no net: U1. U1.1 U1.12 U1.13 U1.16 U1.17 U1.18 U1.26 U3.5 U3.6 U4.5 U4.6 U4.10

## Polygon pours and split planes (outlines as drawn)
GND on Bottom Layer "GND_L02_P001" (solid, remove dead copper, pour order 1): 17.526,117.793 17.526,35.877 24.511,28.893 229.362,28.893 241.173,40.704 241.173,147.892 229.362,159.703 27.559,159.703 17.526,149.67
GND on Top Layer "GND_L01_P000" (solid, remove dead copper, pour order 0): 17.59,107.315 17.59,36.068 24.575,29.083 229.425,29.083 241.237,40.894 241.237,148.018 229.362,159.893 27.622,159.893 17.59,149.86

## Keep-outs
Bottom Layer:
  lines w0.254: 17.399,35.941 17.399,127.889 17.399,149.733 27.432,159.766 229.235,159.766 241.046,147.955 241.046,40.767 229.235,28.956 201.041,28.956 24.384,28.956 17.399,35.941

## Text inside footprints (layer, text, board x,y; h text height)
L1: Top Overlay "OUT-" at 143.764,118.618 h1.52 r180; Top Overlay "OUT+" at 143.51,105.156 h1.52 r180; Top Overlay "IN-" at 180.086,117.856 h1.52 r180; Top Overlay "IN+" at 180.086,105.918 h1.52 r180